# EAGLE board DESIGN6MP_Board (EAGLE 9.3.2)
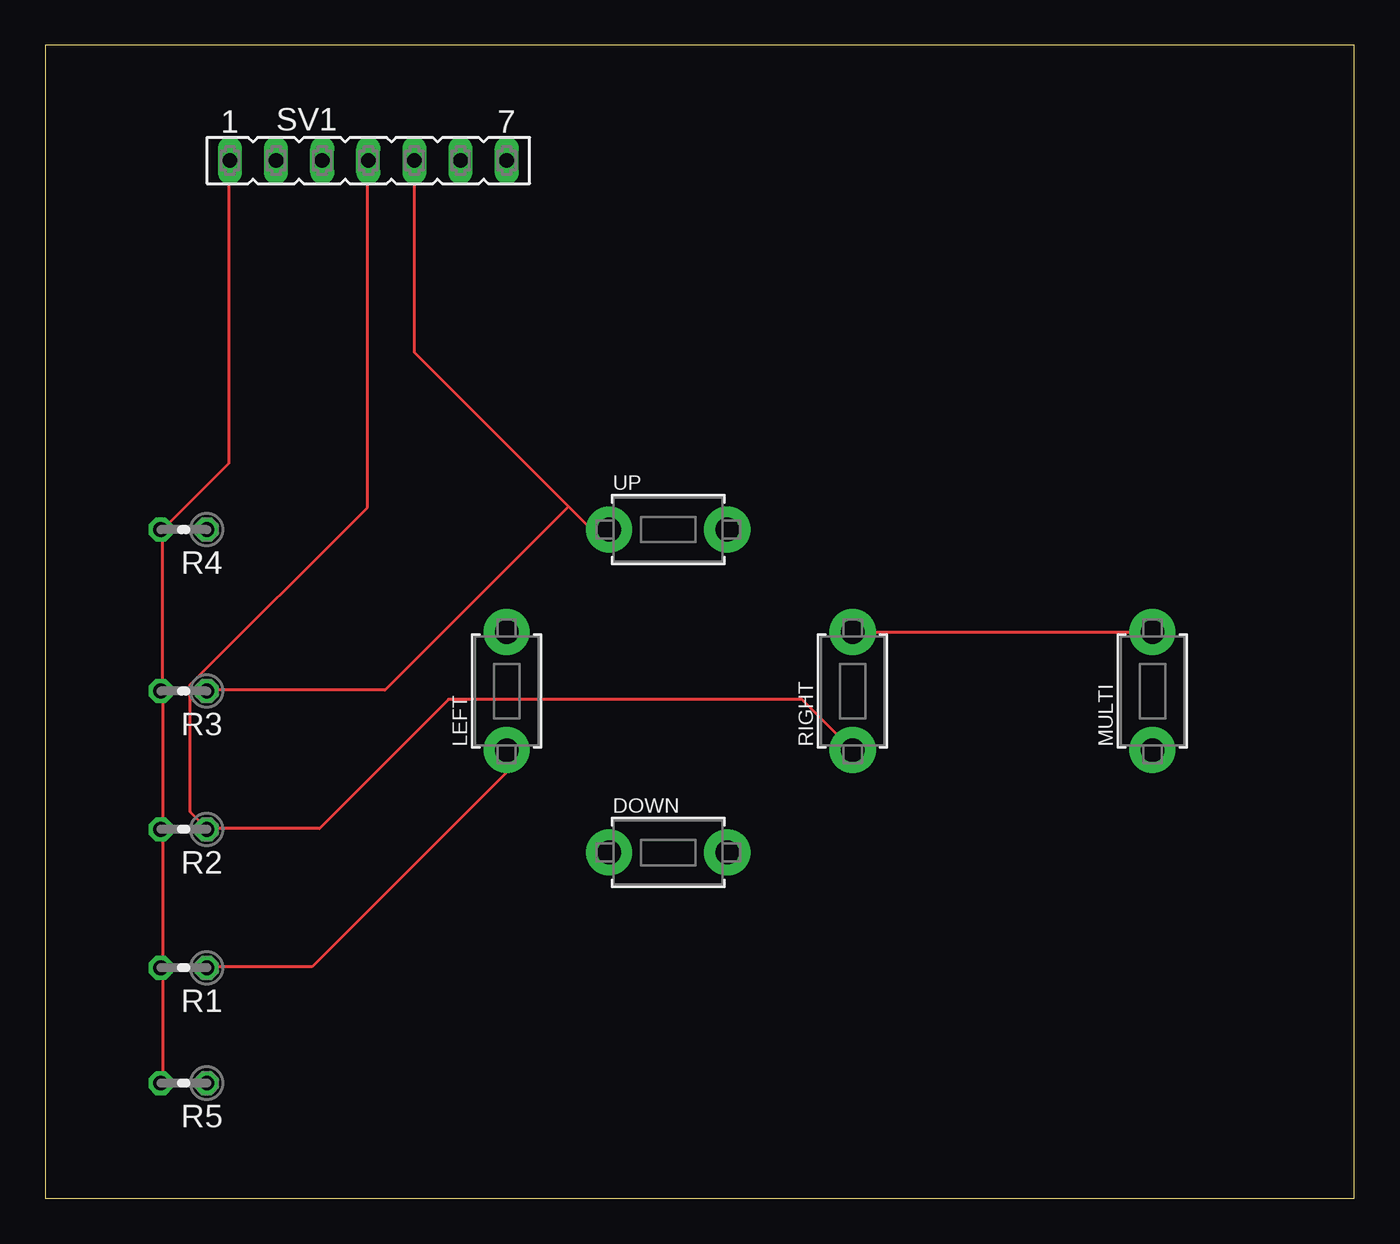
[diagram p0: board, top side]
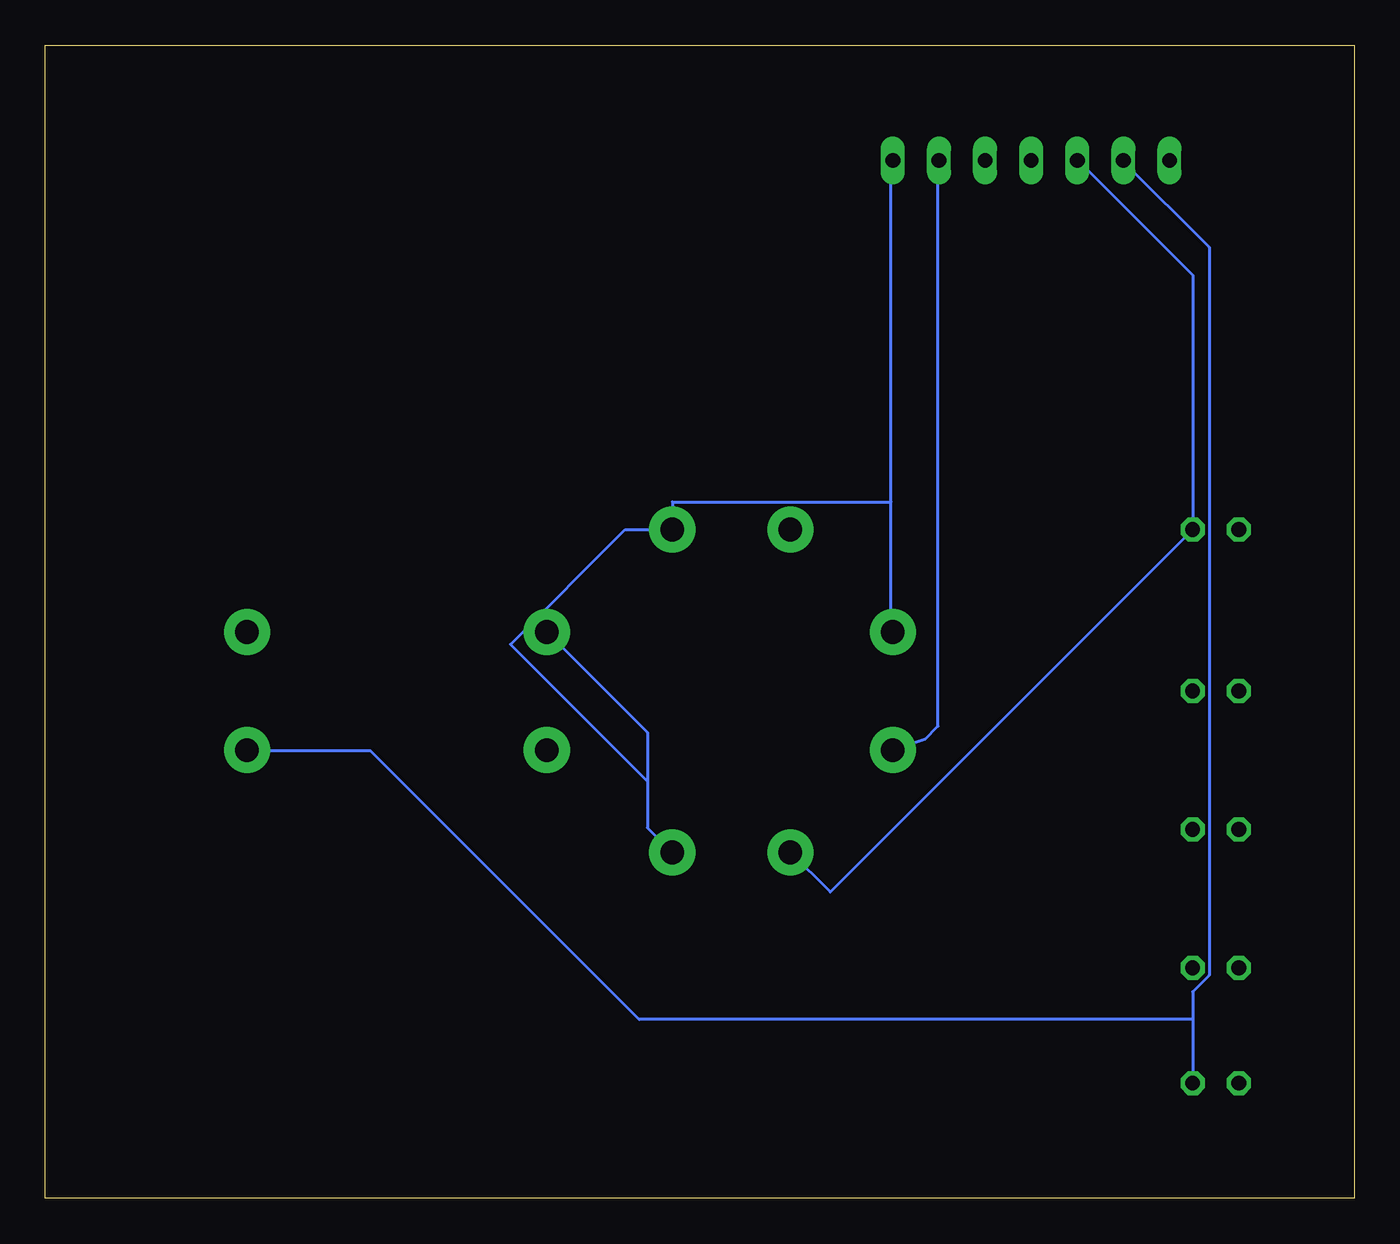
[diagram p1: board, bottom side, seen from below]

Size 72.06 x 63.49 mm. Coordinates in mm from the lower left corner, seen from the top.
Outline: 0,0 72.06,0 72.06,63.49 0,63.49 0,0
Copper layers (1*16): Top 0.035mm / dielectric 1.5mm / Bottom 0.035mm
Design rules "default": minimum track width 6mil, minimum drill 0.35mm, track to track 6mil, track to pad 6mil, pad to pad 6mil, via to via 6mil, smd to smd 6mil, copper to edge 40mil, drill to drill 6mil, minimum pad ring 10mil, minimum via ring 8mil, stop-mask expansion 4mil, vias tented up to drill 0mil, thermal gap 10mil

## Footprints (pad centres in the part's own frame; a part is rotated, then mirrored left to right if it is on the bottom)
TACT_PANA-EVQ = drill 1.3 pad 2.54: P$1 -3.25,0; P$2 3.25,0
0204V = drill 0.813 octagon: 1 -1.27,0; 2 1.27,0
FE07 = drill 0.813 long: 1 -7.62,0; 2 -5.08,0; 3 -2.54,0; 4 0,0; 5 2.54,0; 6 5.08,0; 7 7.62,0

## Placement (x,y rotation side)
DOWN  [TACT_PANA-EVQ]  34.29,19.05 0 top
LEFT  [TACT_PANA-EVQ]  25.4,27.94 90 top
MULTI  [TACT_PANA-EVQ]  60.96,27.94 90 top
R1  27k  [0204V]  7.62,12.7 180 top
R2  27k  [0204V]  7.62,20.32 180 top
R3  27k  [0204V]  7.62,27.94 180 top
R4  27k  [0204V]  7.62,36.83 180 top
R5  27k  [0204V]  7.62,6.35 180 top
RIGHT  [TACT_PANA-EVQ]  44.45,27.94 90 top
SV1  [FE07]  17.78,57.15 0 top
UP  [TACT_PANA-EVQ]  34.29,36.83 0 top

## Library data of the parts
DOWN LEFT MULTI R1-R5 RIGHT UP = adafruit
SV1 = con-lsta; OC_FARNELL: unknown; OC_NEWARK: unknown

## Nets
N$1: R1.2 R2.2 R3.2 R4.2 R5.2 SV1.1
N$2: MULTI.P$1 R5.1 SV1.2
N$3: DOWN.P$1 R4.1 SV1.3
N$4: R2.1 RIGHT.P$1 SV1.4
N$5: R3.1 SV1.5 UP.P$1
N$6: LEFT.P$1 R1.1 SV1.6
N$7: DOWN.P$2 LEFT.P$2 MULTI.P$2 RIGHT.P$2 SV1.7 UP.P$2

## Tracks (layer width: path | path; a pad name or v marks a point on that pad's centre or on a via)
N$1
  Top 0.152: R5.2 6.45,6.35 6.45,12.6 R1.2 6.45,12.75 6.45,20.22 R2.2 6.45,20.37 6.45,27.84 R3.2 6.45,27.99 6.45,36.83 | 6.45,36.83 10.11,40.49 10.11,57.1 SV1.1 | 6.45,36.83 R4.2
N$2
  Bottom 0.152: 8.89,9.86 8.89,11.38 7.98,12.29 7.98,52.38 12.7,57.1 SV1.2 | 8.89,9.86 R5.1 | 8.89,9.86 39.37,9.86 54.15,24.64 60.86,24.64 MULTI.P$1
N$3
  Bottom 0.152: SV1.3 15.14,57.1 8.89,50.85 R4.1 28.84,16.88 DOWN.P$1
N$4
  Top 0.152: 8.89,20.37 15.09,20.37 22.2,27.48 41.66,27.48 RIGHT.P$1 | 8.89,20.37 7.98,21.29 7.98,28.3 17.73,38.05 17.73,57.1 SV1.4 | 8.89,20.37 R2.1
N$5
  Top 0.152: 28.8,38.1 18.69,27.99 8.89,27.99 R3.1 | UP.P$1 30.07,36.83 28.8,38.1 | SV1.5 20.32,46.58 28.8,38.1
N$6
  Top 0.152: R1.1 8.89,12.75 14.68,12.75 25.37,23.44 LEFT.P$1
  Bottom 0.152: SV1.6 22.91,57.1 22.91,26.01 23.64,25.28 LEFT.P$1
N$7
  Top 0.152: MULTI.P$2 60.86,31.19 RIGHT.P$2
  Bottom 0.152: 25.5,38.35 25.5,31.24 LEFT.P$2 | 25.5,38.35 25.5,57.1 SV1.7 | 38.91,22.96 38.91,25.65 RIGHT.P$2 | 38.91,22.96 38.91,20.41 DOWN.P$2 | 38.91,22.96 46.46,30.5 40.13,36.83 UP.P$2 37.54,38.35 25.5,38.35